# Altium PCB amplifier.PcbDoc
Units mil, origin at the board's own origin, x right, y up, seen from the top; angles counter-clockwise.
Board outline 472.44 x 1259.84 mil, 2 copper layers (Top Layer, Bottom Layer); 20 components, 15 nets, 56 pads, 8 vias.
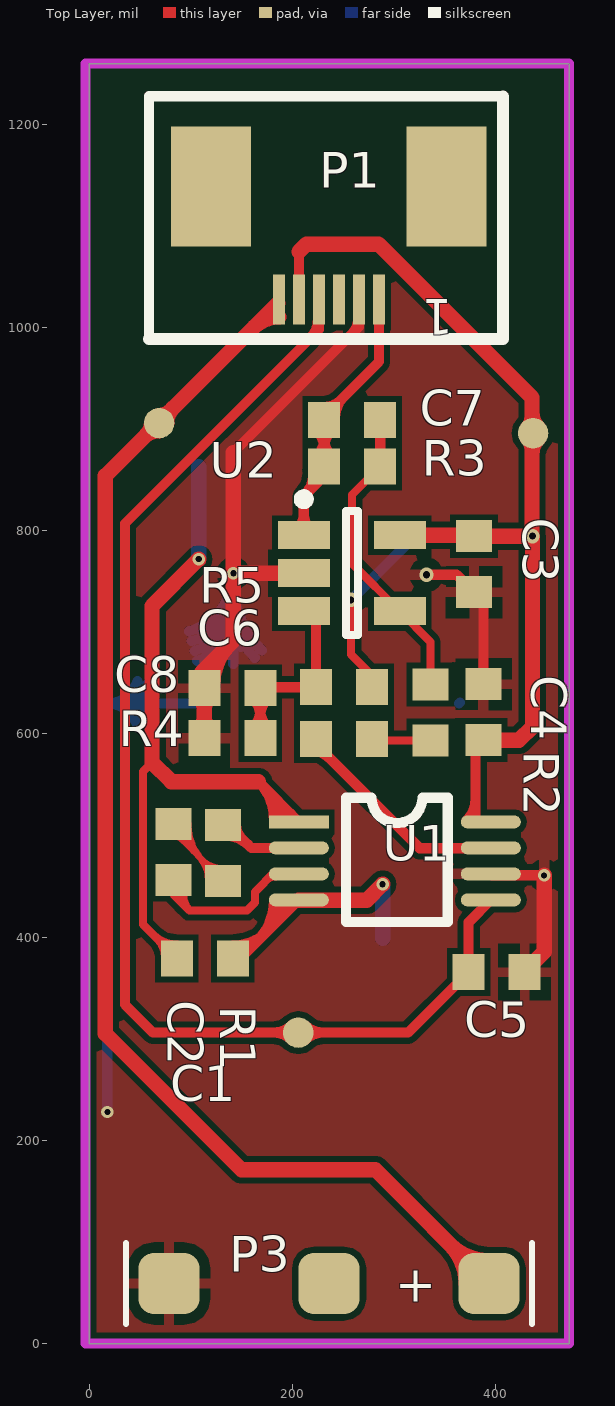
[diagram p0: Top Layer view]
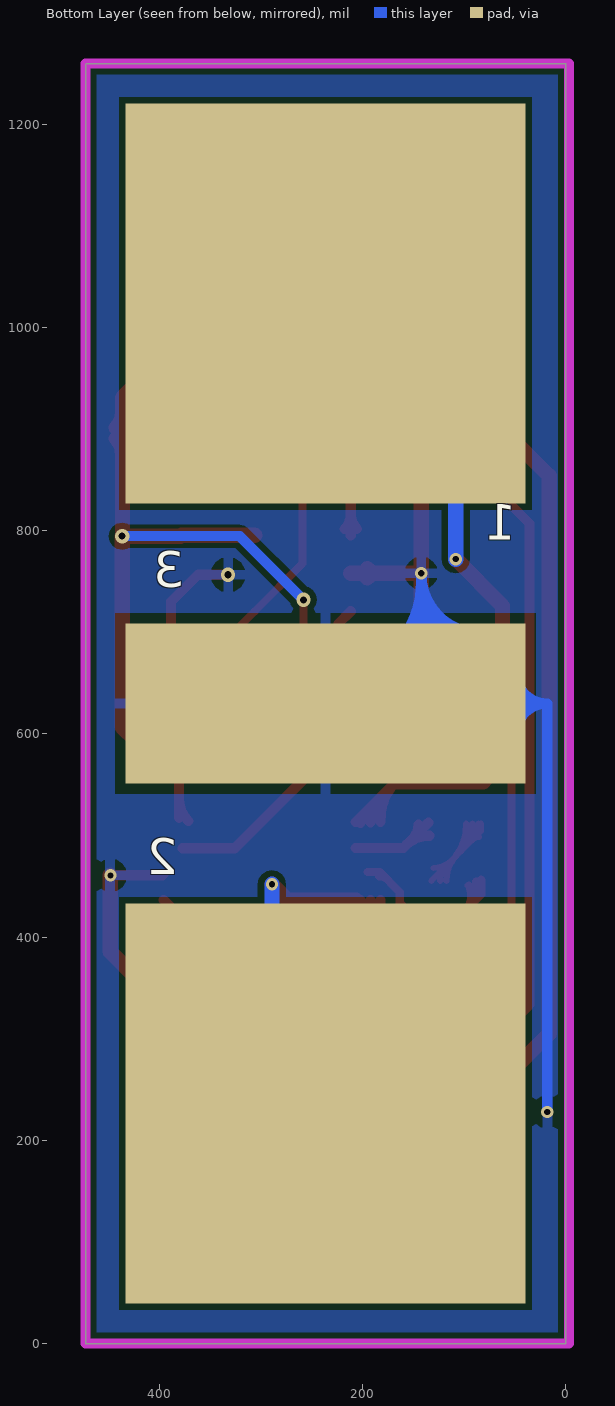
[diagram p1: Bottom Layer view, seen from below]

## Layer stack, top to bottom
Top Layer: signal copper 1.4
Dielectric: dielectric 12.6, FR-4, Dk 4.8
Bottom Layer: signal copper 1.4

## Board outline
0,0 0,1259.84 472.44,1259.84 472.44,0 0,0

## Design rules (kind name [scope] priority, off if disabled: settings)
Clearance [All] p1: gap=6
HoleToHoleClearance [All] p1: gap=4 allowstackedmicrovias=TRUE
MinimumSolderMaskSliver [All] p1: minsoldermaskwidth=4
PlaneClearance [All] p1: clearance=10
PolygonConnect [All] p1: connectstyle=Relief reliefconductorwidth=10 reliefentries=4 polygonreliefangle="90 Angle" airgapwidth=10
RoutingVias [All] p1: holewidth=28 width=50 viastyle="Through Hole" minholewidth=28 minwidth=50 maxholewidth=28 maxwidth=50
SilkToSilkClearance [All] p1: silktosilkclearance=4
SilkToSolderMaskClearance SilkscreenOverComponentPads [IsPad] p1: minsilkscreentomaskgap=10 clearancetoexposedcopper=TRUE
SolderMaskExpansion [All] p1: expansion=4
Width [All] p1: maxlimit=50 minlimit=6 preferedwidth=8
23 further rules are at their usual default settings.

## Components (designator, comment, footprint, x,y, rotation, side; value= is the part's Value field where it differs from the comment)
1 "Electrode" elec-diff 236.22,1023.62 r270 bottom
2 "Electrode" elec-diff 236.22,236.22 r270 bottom
3 "Electrode" elec-ref 236.22,629.92 r270 bottom
C1 "" 1608[0603] 114,379 r180 top
C2 "" 1608[0603] 83,484 r270 top
C3 "" 1608[0603] 379,767 r90 top
C4 "Cap" 1608[0603] 388.29,621.4 r90 top
C5 "Cap" 1608[0603] 401.16,365.59 r180 top
C6 "" 1608[0603] 251,595 r180 top
C7 "" 1608[0603] 259,909 r0 top
C8 "" 1608[0603] 141,645 r0 top
P1 "Header 6" "6P_0.5mm(FPC) - duplicate" 285.43,1027.56 r180 top
P3 "Header 3" BAT3 236.22,59.06 r0 top
R1 "1k" 1608[0603] 132,483 r270 top
R2 "1K" 1608[0603] 336,621 r90 top
R3 "50K" 1608[0603] 259,863 r180 top
R4 "10K" 1608[0603] 141,596 r0 top
R5 "10K" 1608[0603] 251,646 r0 top
U1 "AD8221" MSOP-8 301,475 r0 top
U2 "AD8603" SOT23-5AM 258.59,758.16 r0 top

## Footprints (in the part's own frame and the unit in brackets; to place one, negate y for a bottom-side part, rotate by r counter-clockwise, add the part's x,y. Pads: shape width x height; smd on the part's side, far side on the other; paste and mask are expansions set on the pad)
"6P_0.5mm(FPC) - duplicate" [mm]
  rect 2x3 smd: 0(-1.69,-2.825) 7(4.2,-2.825)
  rect 0.3x1.25 smd mask+0.051: 1(0,0) 2(0.5,0) 3(1,0) 4(1.5,0) 5(2,0) 6(2.5,0)
  silkscreen extent -3.1,-5.08 5.75,0.99
1608[0603] [mm] "Chip Capacitor, Body 1.6x0.8mm, IPC High Density"
  rect 0.8x0.9 smd: 1(-0.7,0) 2(0.7,0)
  body extent -0.87,-0.48 0.87,0.48, height 1.3
BAT3 [mil]
  rrect50% 60x60 smd: 1(-157.48,0) 2(0,0) 3(157.48,0)
  silkscreen extent -200,-40 200,40
elec-diff [mm] "12*5mm"
  rect 10x10 smd: 1(0,0)
elec-ref [mm] "12*5mm"
  rect 4x10 smd: 1(0,0)
MSOP-8 [mm]
  rect 1.5x0.325 smd: 1(-2.4,0.975)
  oval 1.5x0.325 smd: 2(-2.4,0.325) 3(-2.4,-0.325) 4(-2.4,-0.975) 5(2.4,-0.975) 6(2.4,-0.325) 7(2.4,0.325) 8(2.4,0.975)
  silkscreen extent -1.22,-1.52 1.32,1.58
SOT23-5AM [mm] "SOT23, 5-Leads, Body 2.9x1.7mm, Pitch 0.95mm, Lead Span 2.8mm, IPC Low Density"
  rect 1.3x0.7 smd: 1(-1.2,0.95) 2(-1.2,0) 3(-1.2,-0.95) 4(1.2,-0.95) 5(1.2,0.95)
  silkscreen extent -1.32,-1.55 0.15,1.97, body extent -0.9,-1.55 0.9,1.55, height 1.45

## Part data
C1 C2 C3 C6 C7 C8: library part Cap, "Capacitor"
C4 C5: "Capacitor"
P1: "Header, 6-Pin"
P3: "Header, 3-Pin"
R1 R2 R3 R4 R5: library part Res2, "Resistor"
U1: library part INA128UA, "Precision, Low-Power Instrumentation Amplifiers"

## Free pads (board coordinates)
  round 30 smd: 0(437,896) 1(69,906) 1(206,306)

## Via types
v1: diameter 12, hole 6, Top Layer to Bottom Layer, 5 vias
v2: diameter 14, hole 7, Top Layer to Bottom Layer, 3 vias

## Nets (pads, with @x,y where several pads share a name; then routed paths per layer and width w, separated by ;. In a path a pad name is that pad's centre, name@x,y a point inside that pad or via, vN(x,y) a via of type N, cw(c..) or ccw(c..) an arc to the next point about the centre after c; other vN are vias at no path point)
+3.3V: C3.2 C4.1 P1.5 pad.0 R5.2 U1.8 U2.5 | length 1314.7
  Top Layer w8: v2(258,732) 258,678 278.56,657.44 R5.2
  Top Layer w10: P1.5 206.69,1074.69 ; U1.8@371.37,514.37 ccw(c349.33,536.42) 380.5,536.42 ; U1.8@380.5,517.38 C4.1@380.5,597.67
  Top Layer w15: 206.69,1074.69 214,1082 285,1082 436,931 v2@436,797 ; U2.5 378,795.56 C3.2 v2@433.56,794.56 ; C4.1 423.28,593.84 436.39,606.95 v2(436.39,794.64) v2@436,794.64 ; pad.0@431.7,890.7 cw(c421.31,880.31) 436,880.31 ; pad.0@431.7,901.3 ccw(c421.31,911.69) 436,911.69 ; 436,875.48 cw(c457.52,875.48) pad.0@442.3,890.7 ; 436,916.52 ccw(c457.52,916.52) pad.0@442.3,901.3 ; v2@436,794.64 v2@436,797 ; v2@436,794.64 434.64,794.64 434,794 434,795 v2@436,797
  Bottom Layer w10: v2(258,732) 320.64,794.64 v2(436.39,794.64)
+3.7V: P1.6 P3.3 pad.1@69,906 | length 1438.7
  Top Layer w15: 54.49,892.49 cw(c69,877.98) pad.1@69,898.5 ; 56.9,894.9 ccw(c45.81,906) pad.1@61.5,906 ; pad.1@69,913.5 ccw(c69,929.19) 80.1,918.1 ; pad.1@76.5,906 cw(c97.02,906) 82.51,920.51 ; 162.13,1000.13 cw(c187.01,975.25) P1.6@187.01,1010.43 ; P1.6@185.89,1023.89 16,854 16,305 150,171 281.76,171 P3.3 ; P3.3@371.2,59.06 ccw(c316.88,59.06) 355.29,97.47 ccw(c393.7,135.88) P3.3@393.7,81.56
-VS: C5.2 P1.4 pad.1@206,306 U1.5 | length 1299.4
  Top Layer w10: pad.1@198.93,298.93 ccw(c181.86,281.86) 181.86,306 ; pad.1@198.93,313.07 cw(c181.86,330.14) 181.86,306 ; pad.1@213.07,298.93 cw(c230.14,281.86) 230.14,306 ; pad.1@213.07,313.07 ccw(c230.14,330.14) 230.14,306 ; P1.4 226.38,998.03 35.43,807.09 35.43,333.57 63,306 181.86,306 ; U1.5 373.6,414.73 C5.2 314.01,306 230.14,306 ; 217.19,988.84 ccw(c197.19,1008.84) 225.47,1008.84 cw(c197.19,1008.84) 217.19,988.84
GND: 3.1 C3.1 C4.2 C5.1 C8.1 P1.2 P3.1 R4.1 U1.6 U2.2 | length 3142.7
  Top Layer w10: 142,877 265.75,1000.75 P1.2 ; 258.48,993.48 ccw(c243.12,1008.84) P1.2@264.84,1008.84 ; v2(332.07,756.66) 361.78,756.66 C3.1 388.29,730.15 C4.2 ; U1.6 396.86,460.84 v1(448,460.84)
  Top Layer w15: C8.1@106.69,646.97 cw(c130.16,646.97) 113.56,663.56 ; R4.1@107.61,603.8 ccw(c93.53,617.88) 113.44,617.88 ccw(c133.35,617.88) R4.1@119.27,603.8 ; C8.1@107.61,637.2 cw(c93.53,623.12) 113.44,623.12 cw(c133.35,623.12) C8.1@119.27,637.2 ; C8.1@108.67,653.7 ccw(c101.38,664) 114,664 ; R4.1 C8.1 ; C8.1@114,655 114,664 ; C8.1@118.9,653.16 cw(c128.46,664) 114,664 ; C8.1@121.69,646.97 cw(c181.37,646.97) 139.17,689.17 ; 142,877 v1(142,758.16) ; U2.2 v1(142,758.16) ; C5.1@427.63,365.18 448,385.56 v1(448,460.84) ; 114,664 142,692 v1(142,758.16) ; 184.38,758.16 cw(c184.38,743) 195.1,753.72 ccw(c184.38,743) 184.38,758.16 ; 184.38,758.16 ccw(c184.38,773.32) 195.1,762.6 cw(c184.38,773.32) 184.38,758.16
  Bottom Layer w10: v1(18,228) 18,629.92 ; 3.1@110,629.92 18,629.92 ; 3.1@112.83,703.47 ccw(c110.61,734.35) 140.51,726.34 ccw(c167.84,719.01) 3.1@154.05,694.31 ; 3.1@113.55,693.5 ccw(c111.68,719.52) 136.88,712.77 ; 3.1@120.79,693.61 ccw(c121.55,711.46) 3.1@138.81,706.83 ; 3.1@121.22,703.6 ccw(c122.09,724.23) 142.04,718.89 ccw(c162.04,713.53) 3.1@152.41,695.2 ; 137.19,713.93 ccw(c161.39,707.45) 3.1@149.18,685.58 ; 3.1@138.8,706.81 ccw(c156.07,702.18) 3.1@147.76,686.35 ; 3.1@142,669 v1(142,758.16) ; 3.1@364,629.92 3.1@365.08,631 ; 18,629.92 cw(c18,598.84) 47.69,608.06 ccw(c18,598.84) 18,629.92 ; 18,629.92 ccw(c18,661) 47.69,651.79 cw(c18,661) 18,629.92 ; 31.58,629.92 cw(c31.58,603.05) 57.24,611.02 ccw(c31.58,603.05) 31.58,629.92 ; 31.58,629.92 ccw(c31.58,656.79) 57.24,648.82 cw(c31.58,656.79) 31.58,629.92 ; v1(142,758.16) cw(c82.71,758.15) 98.49,701 ccw(c82.71,758.15) v1(142,758.16) ; 3.1@101.15,691.36 ccw(c86.34,745.02) 142,745.02 cw(c86.34,745.02) 3.1@101.15,691.36 ; 3.1@103.81,681.72 ccw(c89.96,731.88) 142,731.88 cw(c89.96,731.88) 3.1@103.81,681.72 ; 3.1@106.47,672.09 ccw(c93.59,718.75) 142,718.75 cw(c93.59,718.75) 3.1@106.47,672.09 ; 3.1@109.13,662.45 ccw(c97.22,705.61) 142,705.61 cw(c97.22,705.61) 3.1@109.13,662.45 ; 142,726.13 ccw(c214.32,726.13) 163.18,674.99 cw(c214.32,726.13) 142,726.13 ; 142,750.27 ccw(c238.46,750.27) 170.25,682.06 cw(c238.46,750.27) 142,750.27
Net1_1: 1.1 C1.2 U1.1 | length 814.3
  Top Layer w8: 62,572 53,563 53,412.44 C1.2 ; 63.03,402.42 ccw(c86.44,425.83) C1.2@86.44,392.72 ; 67.78,397.66 cw(c51.08,380.97) C1.2@74.69,380.97
  Top Layer w10: U1.1@181.99,513.47 ccw(c130.28,516.38) 166.9,553 U1.1 ; 182.7,537.2 cw(c160.19,514.69) U1.1@191.97,512.9 ; 198.5,521.4 cw(c190.1,513.01) U1.1@201.96,512.34
  Top Layer w15: v1(108,772) 62,726 62,572 81,553 166.9,553
  Bottom Layer w15: v1(108,772) 1.1@108,863
Net2_1: 2.1 C1.1 U1.4 | length 370.9
  Top Layer w6: C1.1 C1.1@148.9,379 ; U1.4@206.14,436.24 U1.4
  Top Layer w10: C1.1@141.56,381.72 ccw(c141.56,405.99) 158.73,388.83 ; C1.1@141.56,391.72 ccw(c141.56,440.13) 175.8,405.9 ; C1.1@148.9,379 U1.4@206.14,436.24 ; 164.64,394.74 ccw(c122.77,436.61) U1.4@181.99,436.61 ; 181.71,411.81 ccw(c156.91,436.61) U1.4@191.99,436.61 ; 198.78,428.89 ccw(c191.05,436.61) U1.4@201.99,436.61
  Top Layer w15: U1.4@206.14,436.24 273.24,436.24 v1(289,452)
  Bottom Layer w15: 2.1@289,399 v1(289,452)
NetC2_1: C2.1 R1.2 | length 238.3
  Top Layer w6: C2.1 83,504.44 R1.2 ; C2.1@84.97,498.81 cw(c84.97,489.97) C2.1@91.22,496.22 ; C2.1@85.72,511.56 ccw(c109.46,511.56) 92.67,494.77 ; C2.1@91.72,511.56 ccw(c129.94,511.56) 102.91,484.53 ; C2.1@97.72,511.56 ccw(c150.43,511.56) 113.16,474.28 ; 106.88,480.56 cw(c81.75,455.44) R1.2@117.28,455.44 ; 111.63,475.81 ccw(c130.03,494.21) R1.2@130.03,468.19 ; R1.2@117.12,470.32 cw(c102.24,455.44) R1.2@123.28,455.44
NetC2_2: C2.2 U1.3 | length 213.3
  Top Layer w8: C2.2 83,442 98.81,426.19 ; C2.2@88.26,454.64 ccw(c103.7,446.19) 91.25,433.75 ; C2.2@95.28,450.8 ccw(c113.47,440.86) 98.81,426.19 ; 174.94,456.31 cw(c183.38,447.87) U1.3@183.38,459.81 ; U1.3@194.79,464 182.63,464 163.22,444.59 163.22,434.1 155.31,426.19 98.81,426.19
NetC6_1: C6.1 R2.1 | length 58.1
  Top Layer w8: C6.1 280.12,593.44 R2.1
NetC6_2: C6.2 U1.7 | length 247.5
  Top Layer w10: C6.2@215.44,584.28 cw(c215.44,552.23) 238.1,574.9 ; C6.2@215.72,597.28 325.57,487.43 U1.7@376.95,487.43 ; C6.2@226.19,595.03 ccw(c246.03,595.03) C6.2@232,581
NetC7_2: C7.2 R2.2 R3.1 U2.4 | length 305.8
  Top Layer w8: R3.1 259,835.44 259,767.59 U2.4 336,690.59 R2.2
  Top Layer w10: R3.1@286.56,854 286.56,859 C7.2@286.56,902
NetR1_1: R1.1 U1.2 | length 122.5
  Top Layer w10: R1.1@133.97,499.81 cw(c133.97,466.54) 157.49,490.07 ; R1.1@135,512.56 159.76,487.8 U1.2 ; R1.1@144.72,510.56 ccw(c163.35,510.56) 150.17,497.39
NTC3: P3.2
REF: C8.2 R4.2 R5.1 U2.3 | length 265.6
  Top Layer w10: R4.2@160.96,605.57 ccw(c142.61,623.92) 168.56,623.92 ccw(c194.51,623.92) R4.2@176.16,605.57 ; C8.2@160.96,635.43 cw(c142.61,617.08) 168.56,617.08 cw(c194.51,617.08) C8.2@176.16,635.43 ; R4.2 C8.2 169.56,646 R5.1 223.44,708.66 U2.3
VOUT: C7.1 P1.1 R3.2 U2.1 | length 446.9
  Top Layer w10: U2.1@205.14,801.77 ccw(c190.15,816.76) 211.35,816.76 ccw(c232.54,816.76) U2.1@217.56,801.77 ; U2.1 211.35,833.91 ; R3.2@220.74,860.02 cw(c188.32,856.94) 211.35,833.91 ; R3.2@223.84,872.57 ccw(c205.49,890.92) 231.44,890.92 ccw(c257.39,890.92) R3.2@239.04,872.57 ; C7.1@223.84,899.43 cw(c205.49,881.08) 231.44,881.08 cw(c257.39,881.08) C7.1@239.04,899.43 ; C7.1@231.44,921.72 ccw(c231.44,944.11) 247.28,928.28 ; C7.1@242.19,910.97 cw(c271.69,910.97) 250.83,931.83 ; P1.1 285.43,966.43 231.44,912.44 231.44,854 211.35,833.91
pads on no net: P1.0 P1.3 P1.7

## Polygon pours and split planes (outlines as drawn)
GND on Top Layer "GND" (solid, remove dead copper, pour order 8): -127,1370.51 -135.52,1361.99 -135.52,-73.99 622.5,-73.99 627.61,-68.88 602.06,-43.33 602.06,1385.84
GND on Top Layer "GND" (solid, remove dead copper, pour order 5): 2.02,365 1,363.89 1,7.11 186.98,7.11 188,6 183.91,10.46 183.91,171.01
GND on Bottom Layer "GND" (solid, remove dead copper, pour order 6): -98.03,1355.19 -98.03,-131.89 -87.81,-142.11 -86.1,-143.82 644.66,-143.82 644.66,1360.31 614,1390.97

## Keep-outs
Keep-Out Layer:
  lines w10: -3.46,0 -3.46,1259.84 472.44,1259.84 472.44,0 -3.46,0

## Silkscreen, mask and mechanical layers (free items; w line width, h text height)
Mechanical 1:
  the board outline again, w10

## Text inside footprints (layer, text, board x,y; h text height)
P1: Top Overlay "1" at 358.27,1039.84 h60 r180
P3: Top Overlay "+" at 301.22,29.06 h60